# EAGLE board battery level indicator (EAGLE 7.6.0)
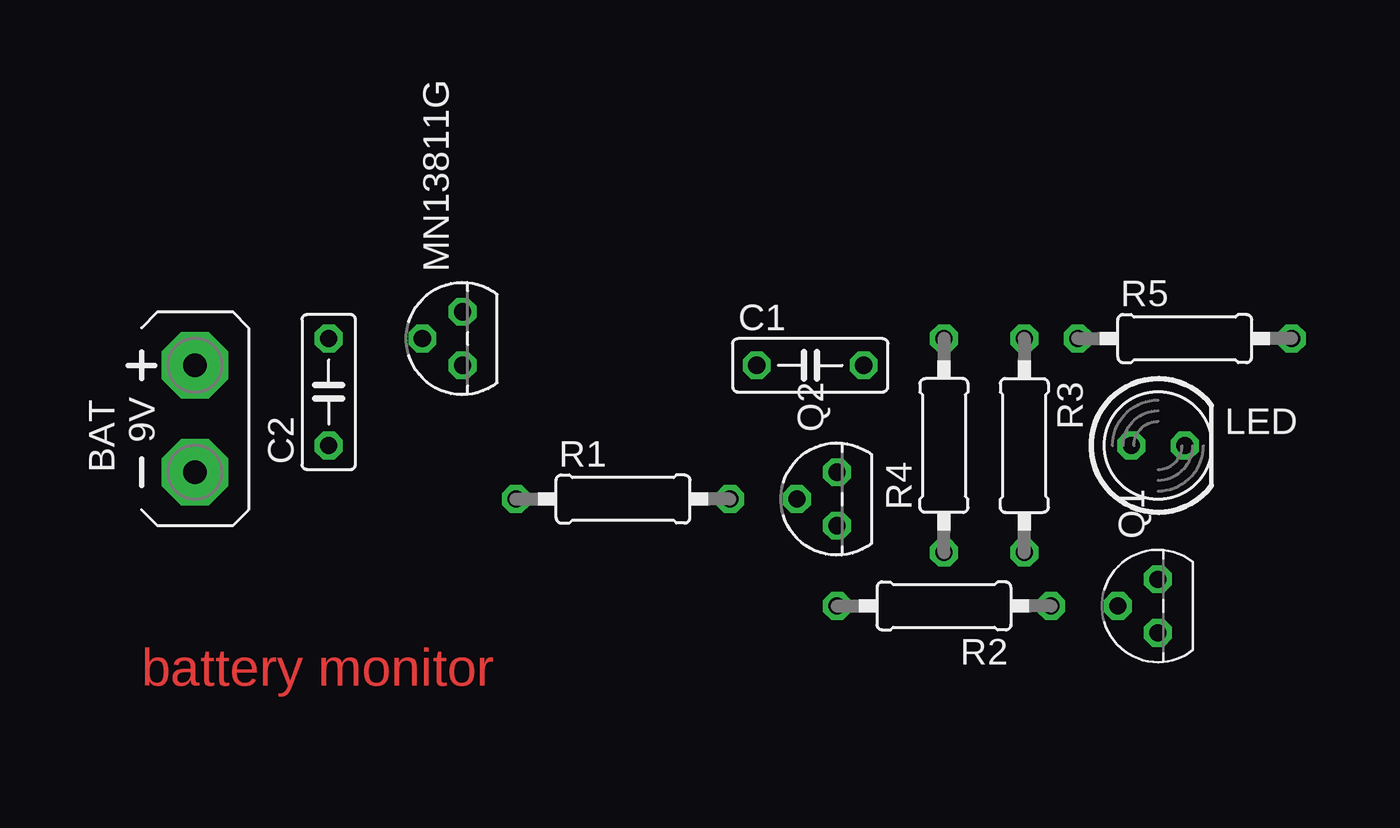
[diagram p0: board, top side]
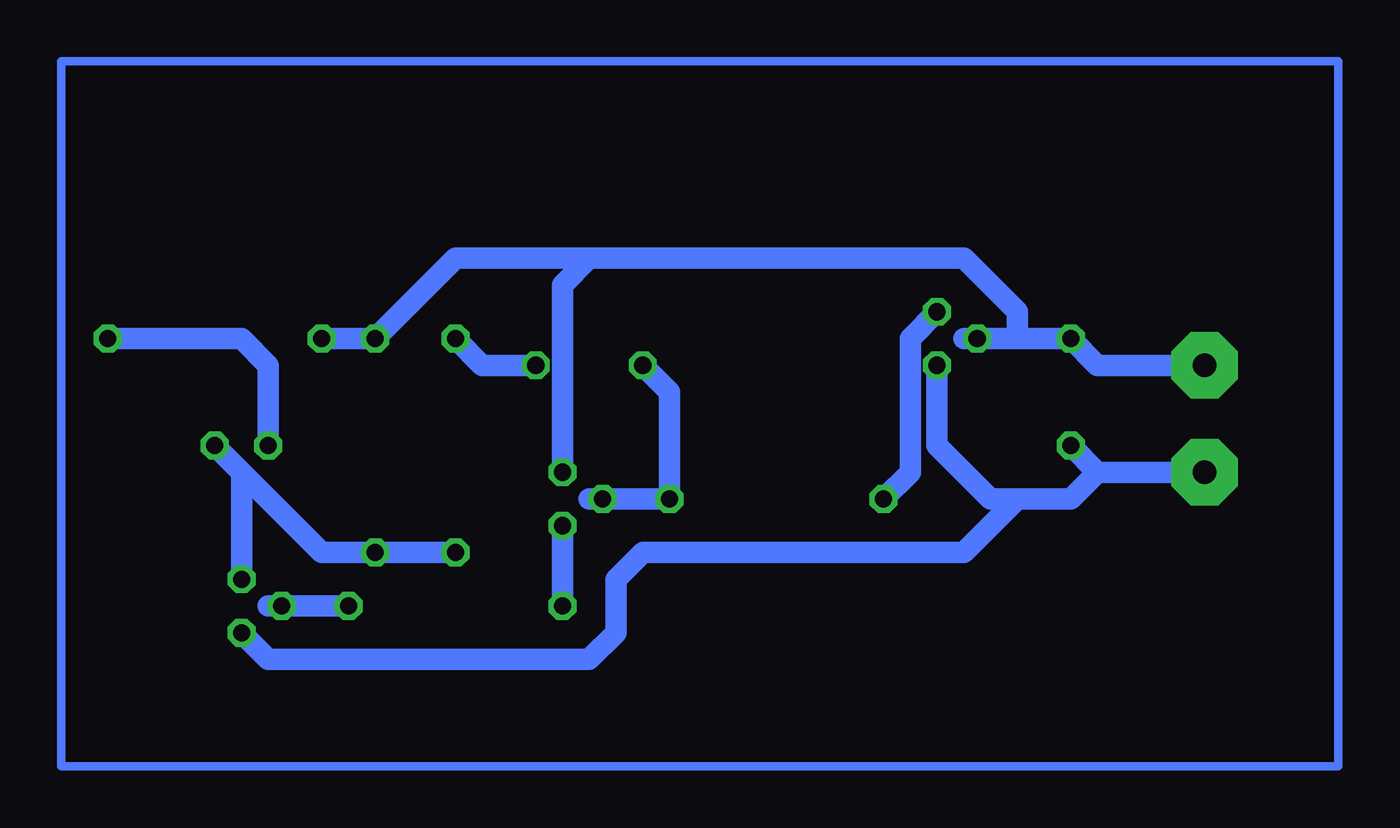
[diagram p1: board, bottom side, seen from below]

No outline drawn. Coordinates in mm, seen from the top.
Copper layers (1*16): Top 0.035mm / dielectric 1.5mm / Bottom 0.035mm
Design rules "default": minimum track width 10mil, minimum drill 24mil, track to track 8mil, track to pad 8mil, pad to pad 8mil, via to via 8mil, smd to smd 8mil, copper to edge 40mil, drill to drill 8mil, minimum pad ring 10mil, minimum via ring 8mil, stop-mask expansion 4mil, vias tented up to drill 0mil, thermal gap 10mil

## Footprints (pad centres in the part's own frame; a part is rotated, then mirrored left to right if it is on the bottom)
AB9V = drill 1.118 pad 3.15 octagon: + 0,2.54; - 0,-2.54
C050-025X075 = drill 0.813 octagon: 1 -2.54,0; 2 2.54,0
LED5MM = drill 0.813 octagon: A -1.27,0; K 1.27,0
TO92 = drill 0.813 octagon: 1 1.27,0; 2 0,1.905; 3 -1.27,0
0207/10 = drill 0.813 octagon: 1 -5.08,0; 2 5.08,0

## Placement (x,y rotation side)
BAT  [AB9V]  7.62,31.75 0 top
C1  0.68uf  [C050-025X075]  36.83,34.29 0 top
C2  100uf  [C050-025X075]  13.97,33.02 90 top
LED  [LED5MM]  53.34,30.48 0 top
MN13811G  [TO92]  20.32,35.56 90 top
Q1  bc548  [TO92]  53.34,22.86 90 top
Q2  bc558  [TO92]  38.1,27.94 90 top
R1  4.7m  [0207/10]  27.94,27.94 0 top
R2  4.7k  [0207/10]  43.18,22.86 180 top
R3  10k  [0207/10]  46.99,30.48 270 top
R4  680ohm  [0207/10]  43.18,30.48 90 top
R5  100ohm  [0207/10]  54.61,35.56 0 top

## Library data of the parts
BAT = battery
C1 C2 R1-R5 = resistor
LED = led
MN13811G Q2 = transistor-pnp
Q1 = transistor-npn

## Nets
S$2: BAT.- C2.1 MN13811G.3 Q1.3
S$3: BAT.+ C2.2 Q2.1 R3.1 R5.1
S$4: C1.1 R1.2
S$5: Q2.3 R2.2
S$6: C1.2 R4.2
S$7: LED.K Q1.1 R3.2 R4.1
S$8: R2.1
S$9: LED.A R5.2
S$11: MN13811G.1 R1.1

## Tracks (layer width: path | path; a pad name or v marks a point on that pad's centre or on a via)
S$1
  Bottom 0.406: 1.27,15.24 1.27,48.73 61.9,48.73 61.9,15.24 1.27,15.24
S$2
  Bottom 1.016: Q1.3 52.07,20.32 36.83,20.32 35.56,21.59 35.56,24.13 34.29,25.4 20.32,25.4 19.05,25.4 16.51,27.94 | MN13811G.3 20.32,30.48 17.78,27.94 16.51,27.94 | 12.7,29.21 C2.1 | BAT.- 12.7,29.21 | 16.51,27.94 13.97,27.94 12.7,29.21
S$3
  Bottom 1.016: BAT.+ 12.7,34.29 C2.2 16.51,35.56 | 16.51,35.56 19.05,35.56 | 16.51,35.56 16.51,36.83 19.05,39.37 36.83,39.37 | 36.83,39.37 43.18,39.37 R3.1 R5.1 | Q2.1 38.1,38.1 36.83,39.37
S$4
  Bottom 1.016: R1.2 33.02,33.02 C1.1 | 35.56,27.94 R1.2 | R1.2 36.83,27.94
S$5
  Bottom 1.016: Q2.3 R2.2
S$6
  Bottom 1.016: C1.2 41.91,34.29 R4.2
S$7
  Bottom 1.016: R4.1 R3.2 49.53,25.4 LED.K 53.34,29.21 Q1.1
S$8
  Bottom 1.016: R2.1 52.07,22.86
S$9
  Bottom 1.016: LED.A 52.07,34.29 53.34,35.56 R5.2
S$11
  Bottom 1.016: MN13811G.1 21.59,35.56 21.59,29.21 R1.1

## Text on the board
Top: battery monitor